# Altium PCB PCB1.PcbDoc
Units mil, origin at the board's own origin, x right, y up, seen from the top; angles counter-clockwise.
Board outline 3580 x 3420 mil, 2 copper layers (Top Layer, Bottom Layer); 23 components, 23 nets, 130 pads, 7 vias.
Unrouted connection lines stored in the file: 2.
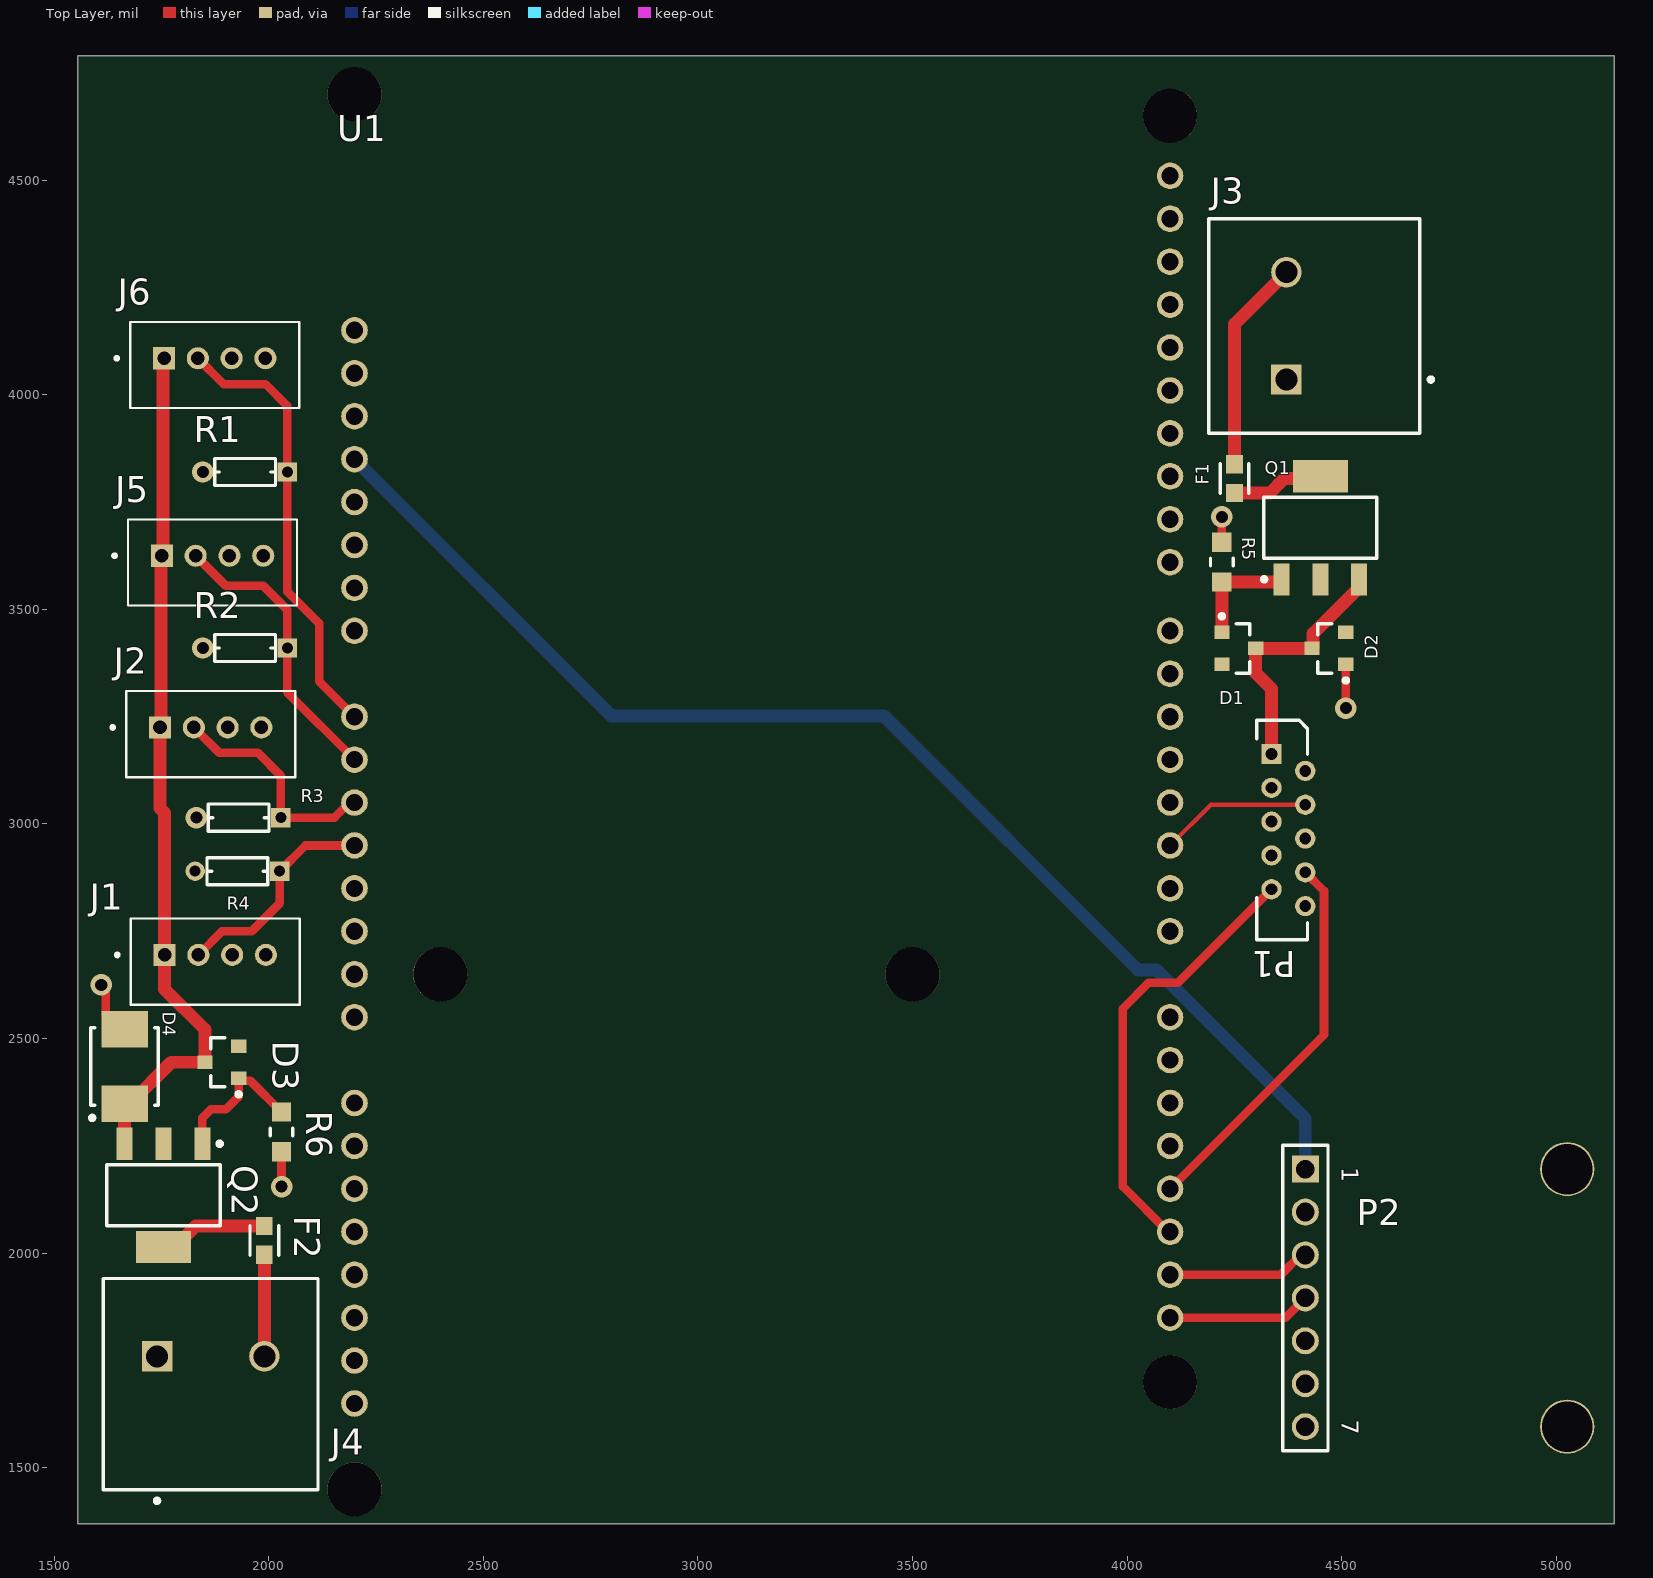
[diagram p0: Top Layer view]
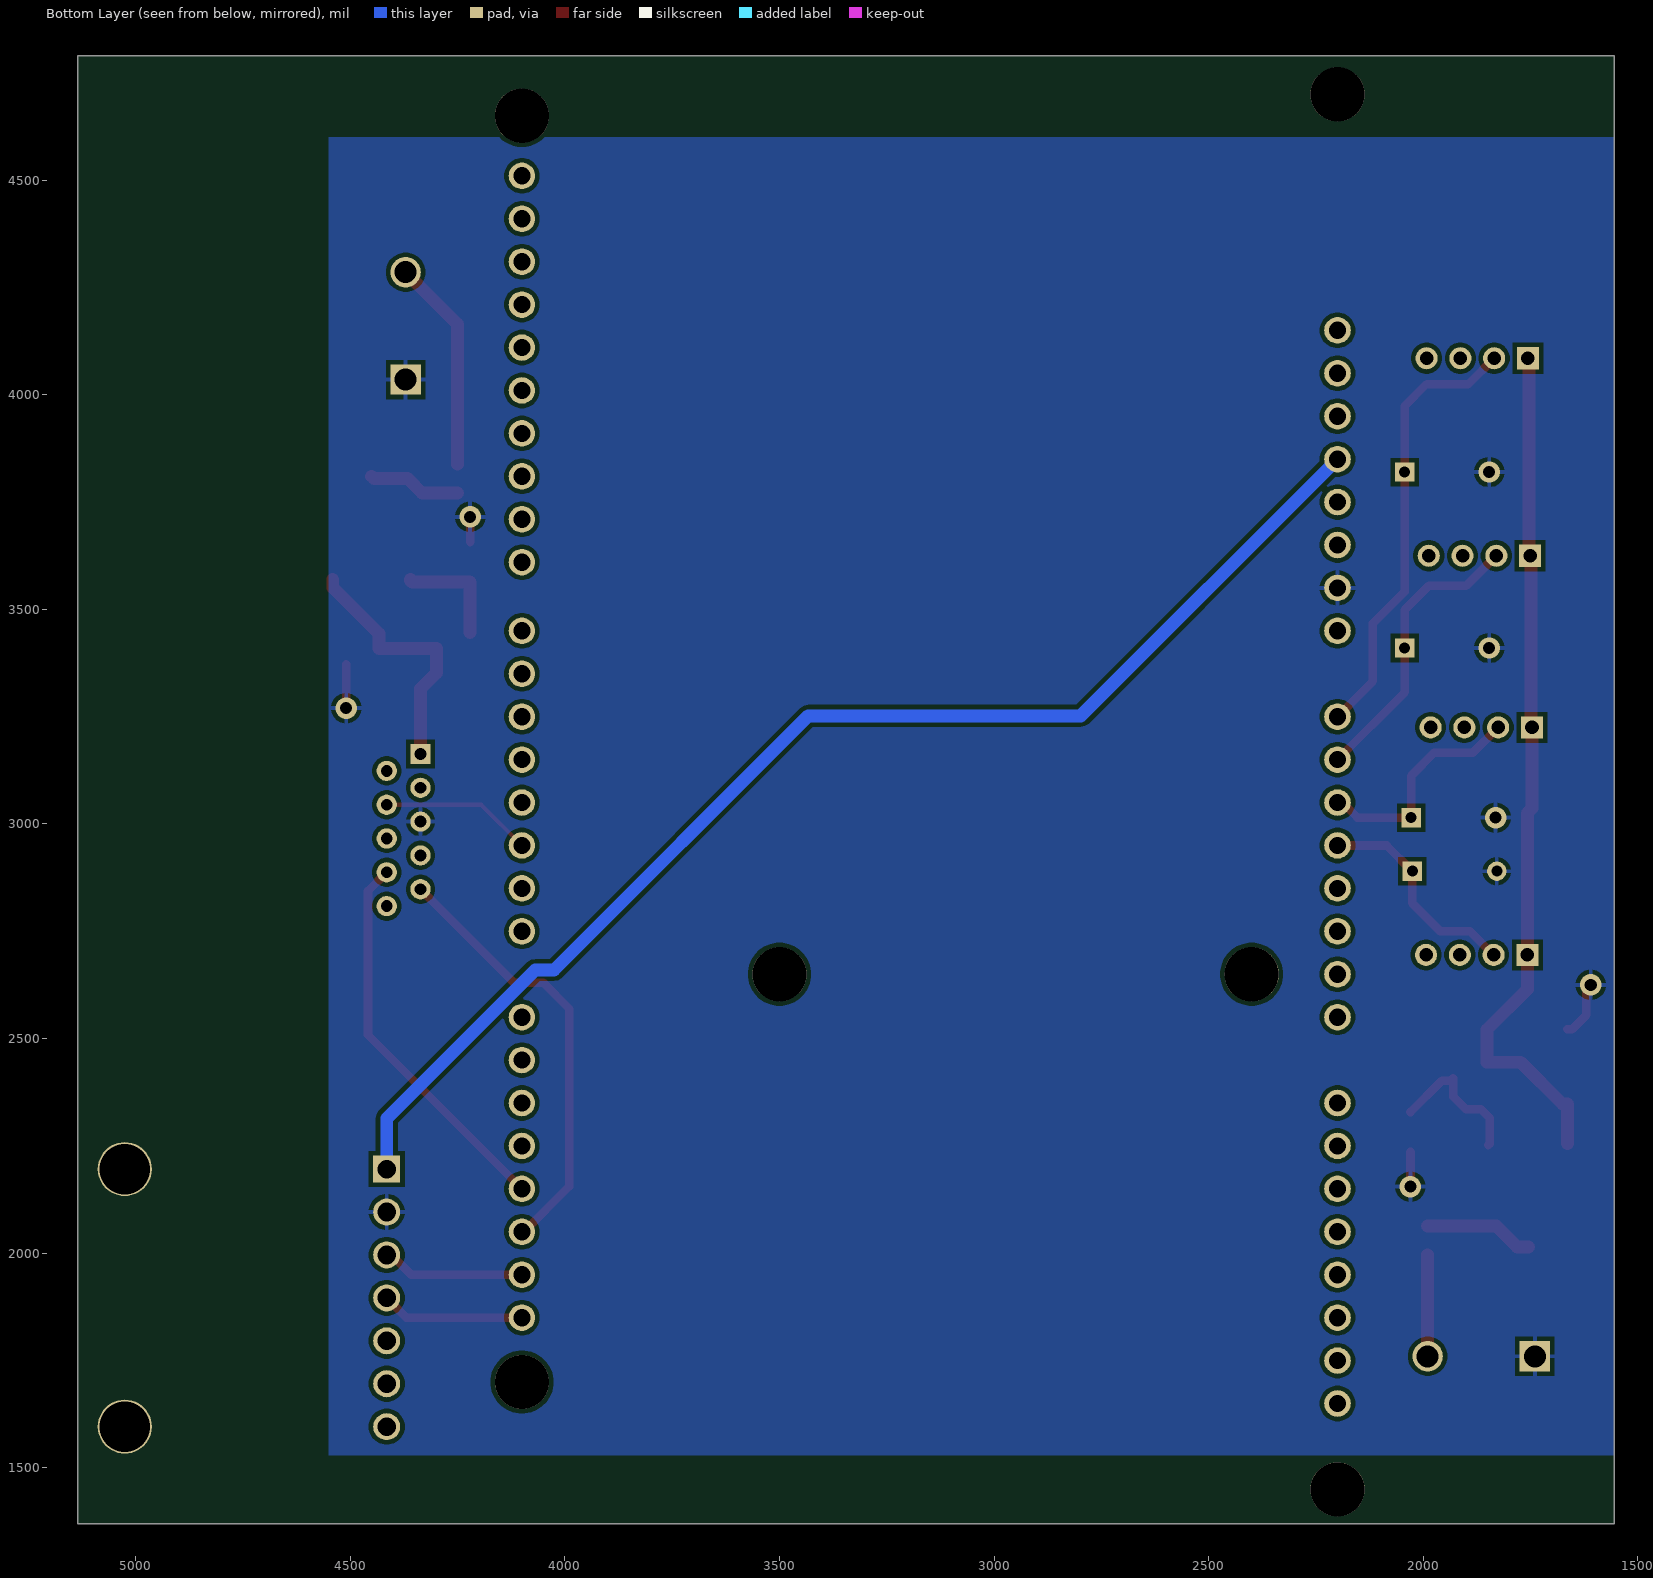
[diagram p1: Bottom Layer view, seen from below]

## Layer stack, top to bottom
Top Solder: solder mask 0.4, Solder Resist, Dk 3.5
Top Layer: signal copper 1.4
Dielectric 1: dielectric 12.6, FR-4, Dk 4.8
Bottom Layer: signal copper 1.4
Bottom Solder: solder mask 0.4, Solder Resist, Dk 3.5

## Board outline
1555,1370 5135,1370 5135,4790 1555,4790

## Design rules (kind name [scope] priority, off if disabled: settings)
Clearance [All] p1: gap=10 ignorepadtopadclearanceinfootprint=FALSE except(0: Arc-Hole Track-Hole SMDPad-Hole THPad-Hole Via-Hole Fill-Hole Poly-Hole Region-Hole Text-Hole)
PolygonConnect [All] p1: connectstyle=Relief reliefconductorwidth=10 reliefentries=4 polygonreliefangle="90 Angle" airgapwidth=10
RoutingVias [All] p1: holewidth=28 width=50 viastyle="Through Hole" minholewidth=28 minwidth=50 maxholewidth=28 maxwidth=50
SolderMaskExpansion [All] p1: expansion=4 istentingtop=FALSE
Width [All] p1: maxlimit=30 minlimit=10 preferedwidth=20 minimp=50.000000 maximp=50.000000 favimp=50.000000
30 further rules are at their usual default settings.

## Classes and differential pairs
component class "Protection Circuit 24V": Q2 R6
component class "Protection Circuit 5V": D2 F1 Q1 R6
component class PCB1_schematic: J1 J2 J3 J5 J6 P1 P2 R1 R2 R6 U1

## Components (designator, comment, footprint, x,y, rotation, side; value= is the part's Value field where it differs from the comment)
D1 "Zener" ONSC-SOT-23-3-318-08_V 4260,3409.09 r0 top
D2 "Zener" ONSC-SOT-23-3-318-08_V 4470,3409.09 r180 top
D3 "Zener 1" ONSC-SOT-23-3-318-08_V 1890.83,2445 r180 top
D4 "Zener 2" ONSC-SMB-2-403A-03_H_V 1664.45,2435 r90 top
F1 "1A Fuse" FP-0603SFS-MFG 4250,3804.61 r270 top value=0.2Ω
F2 "1A Fuse" FP-0603SFS-MFG 1990,2030 r90 top value=0.2Ω
J1 "4 Pin GROVE, RTD" SEEED_110990030 1875.63,2695 r0 top
J2 "4 Pin GROVE, SPT 200 #1" SEEED_110990030 1865,3225 r0 top
J3 "Screw Conn" PHOE-1714955_V 4370.98,4160.43 r90 top
J4 "Screw Conn" PHOE-1714955_V 1865,1760 r0 top
J5 "4 Pin GROVE, SPT 200 #2" SEEED_110990030 1869.37,3625 r0 top
J6 "4 Pin GROVE, SPT 1000" SEEED_110990030 1874.37,4085 r0 top
P1 "VN200 10 Pin" MOLX-52806-1010 4336.26,3163.06 r270 top
P2 "TMP" 61300711121 4415,1896.02 r270 top
Q1 "PMOS" FAIR-SOT223-4_V 4450,3690 r90 top
Q2 "PMOS" FAIR-SOT223-4_V 1755,2135 r270 top
R1 "150" FP-MBA0204-MFG 1945,3820 r180 top value=220Ω
R2 "150" FP-MBA0204-MFG 1945,3410 r180 top value=220Ω
R3 "150" FP-MBA0204-MFG 1930,3015 r180 top value=220Ω
R4 "150" FP-MBA0204-MFG 1927.35,2890 r180 top value=220Ω
R5 "100 kOhm" FP-CR0805-MFG 4220.63,3610 r270 top
R6 "100 kOhms" FP-CR0805-MFG 2030,2282.73 r90 top
U1 "DUE_CONNECTOR" DUE_FOOTPRINT 2200,4150 r0 top

## Footprints (in the part's own frame and the unit in brackets; to place one, negate y for a bottom-side part, rotate by r counter-clockwise, add the part's x,y. Pads: shape width x height; smd on the part's side, far side on the other; paste and mask are expansions set on the pad)
61300711121 [mm] "Pin Header, pitch 2.54 mm, THT, Vertical, single row, 7p"
  rect 1.6x1.6 hole 1.1: 1(-7.62,0)
  round 1.6 hole 1.1: 2(-5.08,0) 3(-2.54,0) 4(0,0) 5(2.54,0) 6(5.08,0) 7(7.62,0)
  silkscreen extent -9.04,-1.35 9.04,1.35, body extent -8.89,-1.27 8.89,1.27, height 8.57
DUE_FOOTPRINT [mm]
  round 1.57 hole 1.02: 0(0,0) 1(0,-2.54) 2(0,-5.08) 3(0,-7.62) 4(0,-10.16) 5(0,-12.7) 6(0,-15.24) 7(0,-17.78) 8(0,-22.86) 9(0,-25.4) 10(0,-27.94) 11(0,-30.48) 12(0,-33.02) 13(0,-35.56) 14(0,-38.1) 15(0,-40.64) 16(0,-45.72) 17(0,-48.26) 18(0,-50.8) 19(0,-53.34) 20(0,-55.88) 21(0,-58.42) 22(0,-60.96) 23(0,-63.5) 24(48.26,-58.42) 25(48.26,-55.88) 26(48.26,-53.34) 27(48.26,-50.8) 28(48.26,-48.26) 29(48.26,-45.72) 30(48.26,-43.18) 31(48.26,-40.64) 32(48.26,-35.56) 33(48.26,-33.02) 34(48.26,-30.48) 35(48.26,-27.94) 36(48.26,-25.4) 37(48.26,-22.86) 38(48.26,-20.32) 39(48.26,-17.78) 40(48.26,-13.716) 41(48.26,-11.176) 42(48.26,-8.636) 43(48.26,-6.096) 44(48.26,-3.556) 45(48.26,-1.016) 46(48.26,1.524) 47(48.26,4.064) 48(48.26,6.604) 49(48.26,9.144)
  body extent -1.27,-64.77 49.53,10.41, height 9.5
FAIR-SOT223-4_V [mm] "SOT223, 4-Leads, Body 6.7x3.7mm, Pitch 2.3mm"
  rect 1.9x0.95 smd: 1(-3.05,2.3) 2(-3.05,0) 3(-3.05,-2.3)
  rect 1.9x3.25 smd: 4(3.05,0)
  silkscreen extent -3.17,-3.35 1.8,3.45, body extent -3.5,-3.35 3.5,3.35, height 1.8
FP-0603SFS-MFG [mil]
  rect 43x39 smd paste+0 mask+0: 1(-33.5,0) 2(33.5,0)
  silkscreen extent -34,-33 34,33, body extent -59,-23 59,23, height 10
FP-CR0805-MFG [mm]
  rect 1.15x1.15 smd paste+0 mask+0: 1(-1.175,0) 2(1.175,0)
  silkscreen extent -0.23,-0.67 0.23,0.67, body extent -1.85,-0.77 1.85,0.77, height 0.25
FP-MBA0204-MFG [mm]
  rect 1.15x1.15 hole 0.65 paste-1000 mask+0: 1(-2.5,0)
  round 1.15 hole 0.65 paste-1000 mask+0: 2(2.5,0)
  silkscreen extent -1.8,-0.8 1.8,0.8, body extent -3.17,-0.9 3.17,0.9, height 0.25
MOLX-52806-1010 [mm] "FFC Connector, 10-Leads, Vertical, Pitch 1.0 mm, Mated Height 5.4 mm, Through Hole"
  rect 1.2x1.2 hole 0.7: 1(0,0)
  round 1.2 hole 0.7: 2(1,2) 3(2,0) 4(3,2) 5(4,0) 6(5,2) 7(6,0) 8(7,2) 9(8,0) 10(9,2)
  silkscreen extent -2,-0.87 11,2.13, body extent -2,-0.87 11,2.13, height 5.41
ONSC-SMB-2-403A-03_H_V [mil] "Molded, 2-Leads, Body 4.6x3.95mm"
  rect 85x107.99 smd: 1(-87.01,0) 2(87.01,0)
  silkscreen extent -125,-79 91,81, body extent -91,-78 91,78, height 95
ONSC-SOT-23-3-318-08_V [mm] "SOT23, 3-Leads, Body 2.92x1.3mm, Pitch 0.95mm"
  rect 0.9x0.8 smd: 1(-1,0.95) 2(-1,-0.95) 3(1,0)
  silkscreen extent -1.12,-1.46 0.65,2.02, body extent -0.65,-1.46 0.65,1.46, height 1.11
PHOE-1714955_V [mm] "Terminal Block, 2-Leads, Body 12.7x12.5mm, Pitch 6.35mm"
  rect 1.8x1.8 hole 1.3: 1(-3.175,0)
  round 1.8 hole 1.3: 2(3.175,0)
  silkscreen extent -6.35,-8.68 6.35,4.6, body extent -6.92,-7.9 6.35,4.6, height 21.51
SEEED_110990030 [mm]
  rect 1.308x1.308 hole 0.8: 1(-3,0)
  round 1.308 hole 0.8: 2(-1,0) 3(1,0) 4(3,0)
  silkscreen extent -5.9,-2.95 5,2.15

## Part data
D1 D3: library part CMP-1060-01182-1, "Zener Voltage Regulator, 225 mW, 3-Pin SOT-23, Pb-Free, Tape and Reel", Manufacturer="On Semiconductor", PartNumber=MMBZ5245BLT3G, ComponentLink1Description="Manufacturer URL", ComponentLink1URL=http://www.onsemi.com/, ComponentLink2Description=Datasheet, ComponentLink2URL=http://www.onsemi.cn/pub_link/Collateral/MMBZ5221BLT1-D.PDF, ComponentLink3Description="Package Specification", ComponentLink3URL=http://www.onsemi.cn/pub_link/Collateral/318-08.PDF, DatasheetVersion="Rev. 12", Mounting Technology="Surface Mount", PackageDescription="3-Pin Small Outline Transistor, Body 2.92 x 1.3 mm, Pitch 0.95 mm", PackageReference=SOT-23-3-318-08, PackageVersion="Rev. AP, 11/2009", Packing="Tape and Reel", RoHS=Pb-Free, VZ Typ (V)=15
D2: library part CMP-1060-01193-1, "Zener Voltage Regulator, 225 mW, 3-Pin SOT-23, Pb-Free, Tape and Reel", Manufacturer="On Semiconductor", PartNumber=SZBZX84C39ET1G, ComponentLink1Description="Manufacturer URL", ComponentLink1URL=http://www.onsemi.com/, ComponentLink2Description=Datasheet, ComponentLink2URL=http://www.onsemi.com/pub_link/Collateral/BZX84C2V4ET1-D.PDF, ComponentLink3Description="Package Specification", ComponentLink3URL=http://www.onsemi.cn/pub_link/Collateral/318-08.PDF, DatasheetVersion="Rev. 8", Mounting Technology="Surface Mount", PackageDescription="3-Pin Small Outline Transistor, Body 2.92 x 1.3 mm, Pitch 0.95 mm", PackageReference=SOT-23-3-318-08, PackageVersion="Rev. AP, 11/2009", Packing="Tape and Reel", RoHS=Pb-Free
D4: library part CMP-1060-00141-1, "3 W Zener Voltage Regulator, 2-Pin SMB, Pb-Free, Tape and Reel", Manufacturer="On Semiconductor", PartNumber=1SMB5934BT3G, ComponentLink1Description="Manufacturer URL", ComponentLink1URL=http://www.onsemi.com/, ComponentLink2Description=Datasheet, ComponentLink2URL=http://www.onsemi.com/pub_link/Collateral/1SMB5913BT3-D.PDF, ComponentLink3Description="Package Specification", ComponentLink3URL=http://www.onsemi.com/pub_link/Collateral/1SMB5913BT3-D.PDF, DatasheetVersion="Rev. 8", Mounting Technology="Surface Mount", PackageDescription="2-Pin Small Molded Package, J-Bend Lead, Body 4.33 x 3.625 mm", PackageReference=SMB-2-403A-03_H, PackageVersion="Rev. H, 05/2011", Packing="Tape and Reel", RoHS=Pb-Free, VZ Typ (V)=24
F1 F2: library part CMP-08605-000034-1, "FUSE BOARD MOUNT 1A 32VDC 0603", Fuse Current=1A, Fuse Interrupt Dc Current=50A, Manufacturer=Littelfuse, Manufacturer Part Number=0603SFS100F/32-2, Max Fuse Dc Voltage=32V, Package=0603SFS, Resistance=0.2Ω, Temperature="-55°C to +125°C", Temperature Range High=+125°C, Temperature Range Low=-55°C, Automotive=No, Category=Fuse, ComponentLink2Description=Datasheet, ComponentLink2URL=https://www.littelfuse.com/~/media/electronics/datasheets/fuses/littelfuse_fuse_sfs_datasheet.pdf.pdf, Device Class L1="Circuit Protection", Device Class L2=Fuses, Device Class L3=unset, Digikey Description="FUSE BOARD MOUNT 1A 32VDC 0603", Fuse Blow Speed=Slow, Fuse I2T=0.093A2Sec, Height=0.95mm, Ipc Land Pattern Name=CAPC16080X80, Lead Free=Yes, Octopart=https://octopart.com/0603sfs100f%2F32-2-littelfuse-74214378, RoHS=TRUE, Voltage Rating=32V
J1 J2 J5 J6: library part 110990030, "GROVE 2MM 4PIN VERT CONN 10PCS", Package=None, Arrow_Electronics-Purchase-URL=https://snapeda.com/shop?store=Arrow+Electronics&id=583576, Availability=Good, MF="Seeed Technology", Mouser-Purchase-URL=https://snapeda.com/shop?store=Mouser&id=583576, MP=110990030, Price=None, SnapEDA_Link=https://www.snapeda.com/parts/110990030/Seeed%20Technology%20Co.,%20Ltd/view-part/583576/?ref=snap
J3 J4: library part CMP-2000-05797-1, "PC Terminal Block, Pitch 6.35 mm, 1 x 2 Position, Height 21.5 mm, Tail Lenght 5.1 mm, RoHS, Bulk", Manufacturer="Phoenix Contact", Package Description="PC Terminal Block, Pitch 6.35 mm, 1 x 2 Position, Height 21.5 mm, Tail Lenght 5.1 mm", Package Reference=1714955, Datasheet URL=http://media.digikey.com/pdf/Data%20Sheets/Phoenix%20Contact%20PDFs/1714955.pdf, Datasheet Version=02/2010, Manufacturer URL=http://www.phoenixcontact.com/, Mounting Technology=ThroughHole
P1: library part CMP-1242-00167-1, "1.0 mm Pitch FFC Connector, 5.4 mm Mated Height, Vertical, Non-ZIF, Through Hole, 10 Circuits, -20 to 80 degC, ELV and RoHS Compliant, Tray", Current (Max per Contact)=0.5A, Manufacturer=Molex, PartNumber=52806-1010, Voltage (Max)="50V AC (RMS)/DC", Circuits (Loaded)=10, Circuits (maximum)=10, ComponentLink1Description="Manufacturer URL", ComponentLink1URL=http://www.molex.com/molex/index.jsp, ComponentLink2Description=Datasheet, ComponentLink2URL=http://www.molex.com/webdocs/datasheets/pdf/en-us/0528061010_FFC_FPC_CONNECTORS.pdf, ComponentLink3Description="Package Specification", ComponentLink3URL=http://www.molex.com/pdm_docs/sd/528061010_sd.pdf, Contact Position=N/A, Durability (mating cycles max)=10, Entry Angle=Vertical, Mated Height=5.40mm, Material - Metal="Phosphor Bronze", Material - Plating Mating=Tin, Material - Plating Termination=Tin, Mounting Technology="Through Hole", Number Of Rows=1, Orientation=Vertical, PackageDescription="10-Lead FFC Connector, Pitch 1.0 mm", PackageReference=52806-1010, PackageVersion="Rev. B, 08/2002", Packing=Tray, PCB Locator=No, PCB Retention=None, Pitch - Mating Interface=1.00mm, Pitch - Termination Interface=1.00mm, Polarized to PCB=No, RoHS=TRUE, Stackable=No
P2: library part CMP-1502-01074-1, "THT Vertical Pin Header WR-PHD, Pitch 2.54 mm, Single Row, 7 pins", Contact Resistance=20mOhm, Manufacturer="Wurth Elektronik", Operating Temperature=-40to105degC, Package Reference=61300711121, Rated Current=3A, Withstanding Voltage=500VAC, Working Voltage=250VAC, Datasheet URL=https://katalog.we-online.de/em/datasheet/6130xx11121.pdf, Gender=Male, Manufacturer URL=http://www.we-online.de, Mounting Technology=THT, Orientation=Vertical, Packaging=Bag, Part Number=61300711121, Pin Number=7, Pitch=2.54mm, Publisher=WurthElektronik, Row Number=Single
Q1 Q2: library part CMP-2000-06838-1, "P-Channel Enhancement Mode Field Effect Transistor, 60 V, 2.5 A, -55 to 150 degC, 4-Pin SOT223, RoHS, Tape and Reel", Drain-Source On Resistance-Max=300mO, Drain-to-Source Voltage [Vdss]=60V, Manufacturer="Fairchild Semiconductor", Package Description="4-Pin Small Outline Transistor, Body 6.45 x 3.5 mm, Pitch 2.3 mm", Package Reference=SOT223-4, Package Version="Rev. 3, 07/2016", Rated Power Dissipation=3W, Channel Type=P-Channel, Datasheet URL=http://www.mouser.com/ds/2/149/NDT2955-116189.pdf, Datasheet Version="Rev. 1.4, 04/2015", Manufacturer URL=https://www.fairchildsemi.com/, Mounting Technology=SurfaceMount, Package URL=https://www.fairchildsemi.com.cn/package-drawings/MA/MA04A.pdf, Qg Gate Charge=15nC
R1 R2 R3 R4: library part CMP-02408-000005-1, "RES 220 OHM 0.4W 1% AXIAL", Manufacturer="Vishay BC Components", Manufacturer Part Number=MBA02040C2200FC100, Package=MBA0204, Power Rating=0.25W, Resistance=220Ω, Temperature="-55°C to +125°C", Temperature Coefficient=50ppm/°C, Temperature Range High=+125°C, Temperature Range Low=-55°C, Tolerance=1%, Voltage Rating=200V, Automotive=Yes, Automotive Grade="Grade 1", Category=Res, ComponentLink2Description=Datasheet, ComponentLink2URL=http://www.vishay.com/docs/28766/mbxsma.pdf, Composition="Metal Film", Device Class L1="Passive Components", Device Class L2=Resistors, Device Class L3="Through-Hole Resistors", Digikey Description="RES 220 OHM 0.4W 1% AXIAL", Height=1.6mm, Ipc Land Pattern Name=RESAD500W65L360D160, Lead Free=Yes, Mouser Description="Thin Film Resistors - Through Hole .4watt 220ohms 1% 1/8watt body size", Octopart=https://octopart.com/mba02040c2200fc100-vishay-43743094, RoHS=TRUE, Series="MBA/SMA 0204"
R5 R6: library part CMP-07231-001707-1, "Thick Film Chip Resistors 0805 100kΩ 0.125W 5% 200ppm/°C", Case Code (Imperial)=0805, Case Code (Metric)=2012, Max Operating Temperature=155°C, Max Power Dissipation=125mW, Min Operating Temperature=-55°C, Package Quantity=10000, Resistance=100kR, Temperature Coefficient=200ppm/°C, Tolerance=5%, Voltage Rating=150V, Case/Package=0805, Composition="Thick Film", Contact Plating=Tin, Depth=1.25mm, Features="Moisture Resistant", Height=0.024inch, Length=0.079inch, Military Standard=Not, Mount="Surface Mount", Number of Terminations=2, Packaging="Tape and Reel", Power Rating=125mW, Radiation Hardening=No, Termination=SMD/SMT, Thickness=508um, Width=0.049inch

## Free pads (board coordinates)
  round 125.98 hole 125.98 unplated: MH1(2200,1450) MH3(4100,1700) MH4(2200,4700) MH5(3500,2650) MH6(2400,2650)
  round 125.98 hole 118.11 unplated: MH1(5025.24,1596.02) MH1(5025.24,2196.02)
  round 125.98 hole 125.98: MH2(4100,4650)

## Via types
v1: diameter 50, hole 28, Top Layer to Bottom Layer, 7 vias

## Nets (pads, with @x,y where several pads share a name; then routed paths per layer and width w, separated by ;. In a path a pad name is that pad's centre, name@x,y a point inside that pad or via, vN(x,y) a via of type N, cw(c..) or ccw(c..) an arc to the next point about the centre after c; other vN are vias at no path point)
5V: D1.3 D2.3 P1.1 Q1.3 | length 600.1
  Top Layer w30: P1.1 4336.26,3315 4299.37,3351.89 D1.3 D2.3 4432.6,3409.09 4433.35,3409.84 4433.35,3444.02 4540.55,3551.22 Q1.3
24V: D3.3 D4.1 J1.1 J2.1 J5.1 J6.1 Q2.3 | length 2007.3
  Top Layer w30: Q2.3 D4.1 1675.94,2347.99 1772.95,2445 D3.3 1851.46,2521.06 1757.52,2615 J1.1 1757.52,3025.99 1746.89,3036.62 J2.1 1749.07,3227.19 1749.07,3622.82 J5.1 1753.76,3627.5 1753.76,4082.5 J6.1
33V: P2.1 U1.3 | length 2969.3
  Bottom Layer w30: U1.3 2798.04,3251.96 3433.04,3251.96 4025,2660 4069.06,2660 4415,2314.06 P2.1
GND: D2.1 D4.2 J3.1 J4.1 P1.5 P2.2 R1.2 R2.2 R3.2 R4.2 R5.1 R6.1 U1.6 | length 374.2
  Top Layer w20: v1(1610,2625) 1610,2616.88 1620.45,2606.43 1620.45,2554.51 1652.95,2522.01 D4.2 ; v1(2030,2155.39) R6.1 ; R5.1 v1(4220.63,3715.39) ; v1(4509.37,3270) D2.1
  other v1: 1831.57,3015 1846.57,3410 1846.57,3820
NetD1_1: D1.1 Q1.1 R5.2 | length 260.1
  Top Layer w30: D1.1 R5.2 4355.75,3563.74 4359.45,3567.44 Q1.1
NetD3_1: 
NetD3_1: D3.1 Q2.1 R6.2 | length 344.5
  Top Layer w20: Q2.1@1848.5,2252.13 Q2.1 1845.55,2315.31 1865.24,2335 1900,2335 1930.2,2365.2 D3.1 1935.94,2401.85 1957.14,2401.85 R6.2
NetD3_3: 
NetF1_1: F1.1 J3.2 | length 497.4
  Top Layer w30: F1.1 4250,4164.45 J3.2
NetF1_2: F1.2 Q1.2 Q1.4 | length 216.1
  Top Layer w30: F1.2 4332.48,3771.11 4365.98,3804.61 4444.54,3804.61 Q1.4
NetF2_1: 
NetF2_1: F2.1 J4.2 | length 236.5
  Top Layer w30: J4.2 F2.1
NetF2_2: 
NetF2_2: F2.2 Q2.2 Q2.4 | length 255.1
  Top Layer w30: Q2.4 1781.57,2014.92 1830.15,2063.5 F2.2
NetJ1_2: J1.2 R4.1 U1.11 | length 513.1
  Top Layer w20: J1.2 1891.26,2750 1960.43,2750 2025.77,2815.34 R4.1 2085.77,2950 U1.11
NetJ2_2: J2.2 R3.1 U1.10 | length 532.9
  Top Layer w20: J2.2 1884.84,3165.79 1975,3165.79 2028.43,3112.36 R3.1 2153.69,3015 2188.69,3050 U1.10
NetJ5_2: J5.2 R2.1 U1.9 | length 679.5
  Top Layer w20: J5.2 1900,3555 1987.48,3555 2043.43,3499.06 R2.1 2043.43,3306.57 U1.9
NetJ6_2: J6.2 R1.1 U1.8 | length 1043.2
  Top Layer w20: J6.2 1895.12,4024.88 1992.48,4024.88 2043.43,3973.94 R1.1 2043.43,3541.48 2117.71,3467.19 2117.71,3332.29 U1.8
NetP1_4: P1.4 U1.34 | length 354.3
  Top Layer w10: U1.34 4194.95,3044.95 P1.4
NetP1_8: P1.8 U1.27 | length 904.1
  Top Layer w20: U1.27 4458.62,2508.62 4458.62,2843.84 P1.8
NetP1_9: P1.9 U1.26 | length 1029.7
  Top Layer w20: U1.26 4095.39,2050 3990,2155.39 3990,2570 4050,2630 4118.16,2630 P1.9
NetP2_3: P2.3 U1.25 | length 334.1
  Top Layer w20: U1.25 4358.05,1950 4404.07,1996.02 P2.3
NetP2_4: P2.4 U1.24 | length 334.1
  Top Layer w20: U1.24 4368.98,1850 P2.4
pads on no net: D1.2 D2.2 D3.2 J1.3 J1.4 J2.3 J2.4 J5.3 J5.4 J6.3 J6.4 P1.2 P1.3 P1.6 P1.7 P1.10 P2.5 P2.6 P2.7 U1.0 U1.1 U1.2 U1.4 U1.5 U1.7 U1.12 U1.13 U1.14 U1.15 U1.16 U1.17 U1.18 U1.19 U1.20 U1.21 U1.22 U1.23 U1.28 U1.29 U1.30 U1.31 U1.32 U1.33 U1.35 U1.36 U1.37 U1.38 U1.39 U1.40 U1.41 U1.42 U1.43 U1.44 U1.45 U1.46 U1.47 U1.48 U1.49

## Polygon pours and split planes (outlines as drawn)
GND on Bottom Layer "GND_L02_P003" (solid, pour order 3): 1555,4600 4550,4600 4550,1530 1555,1530

## Text inside footprints (layer, text, board x,y; h text height)
P2: Top Overlay "7" at 4500,1612.03 h40 r270; Top Overlay "1" at 4500,2200 h40 r270